# Altium PCB VT18-MODEL-B.PcbDoc (part 1 of 3)
Units mil, origin at the board's own origin, x right, y up, seen from the top; angles counter-clockwise.
Board outline 4724.41 x 4645.67 mil, 4 copper layers (Top Layer, Internal Plane 1, Internal Plane 2, Bottom Layer), stack 30.635 mil thick; 246 components, 149 nets, 926 pads, 600 vias.
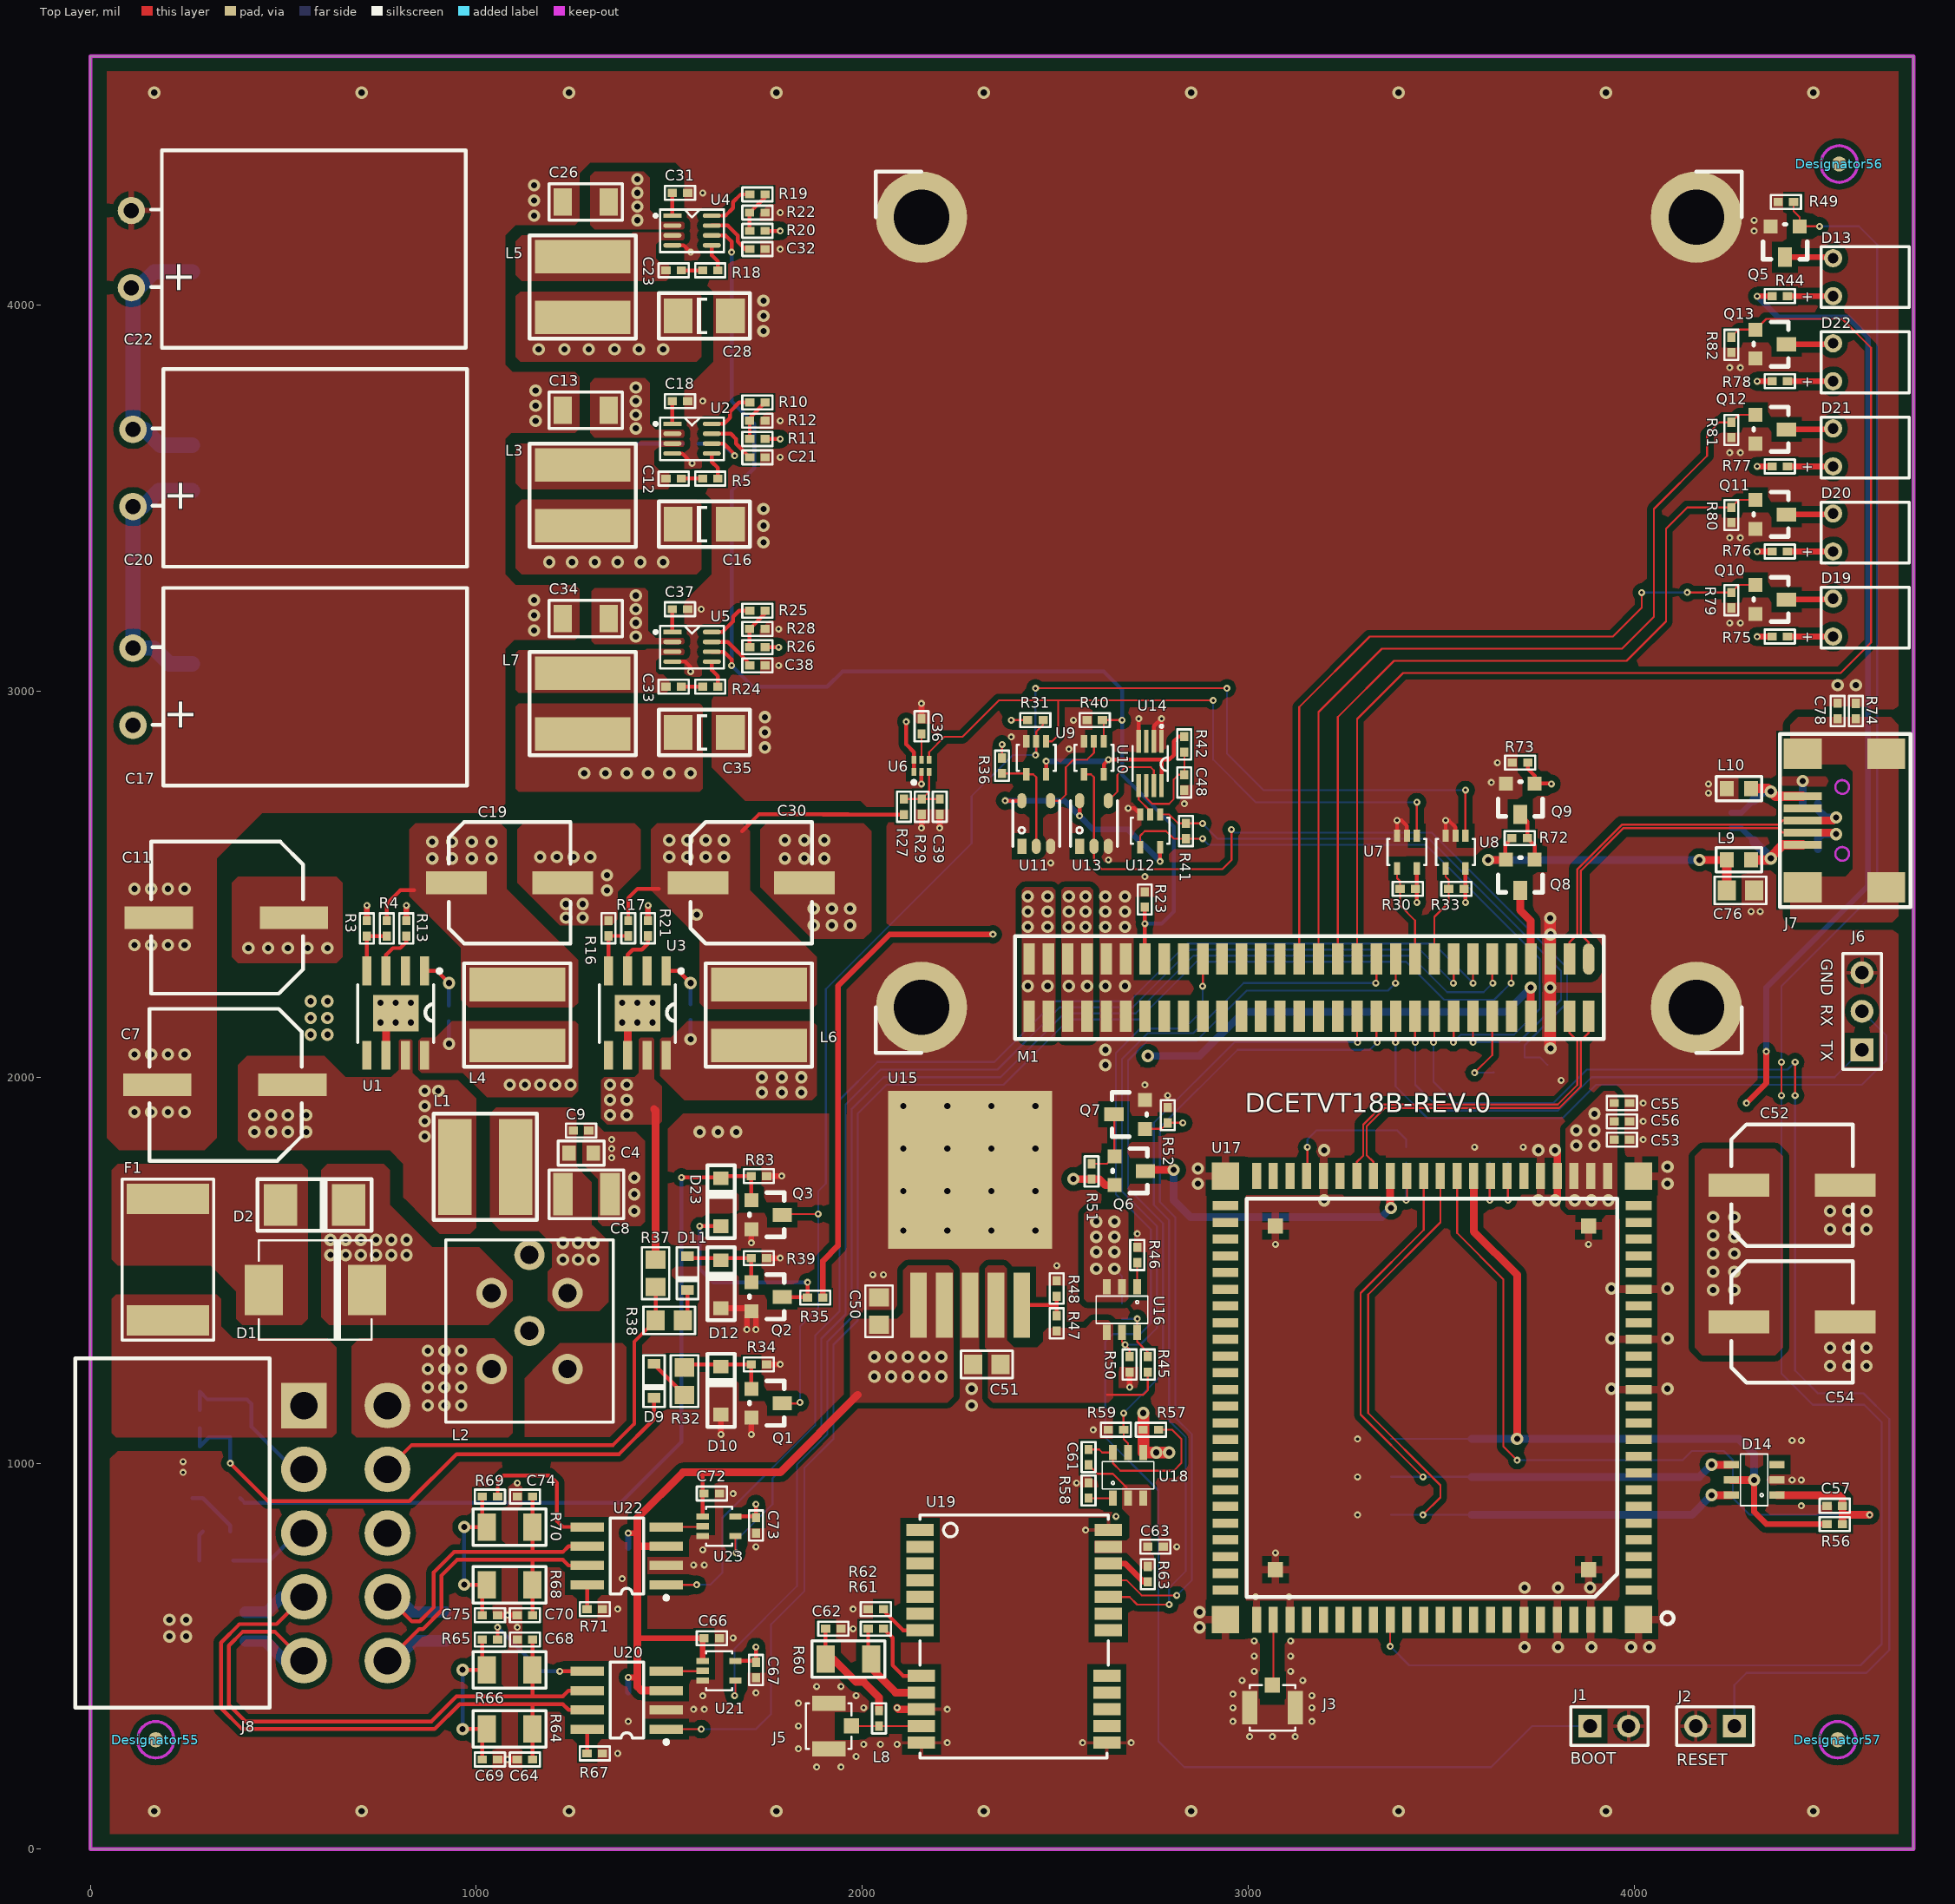
[diagram p0: Top Layer view]
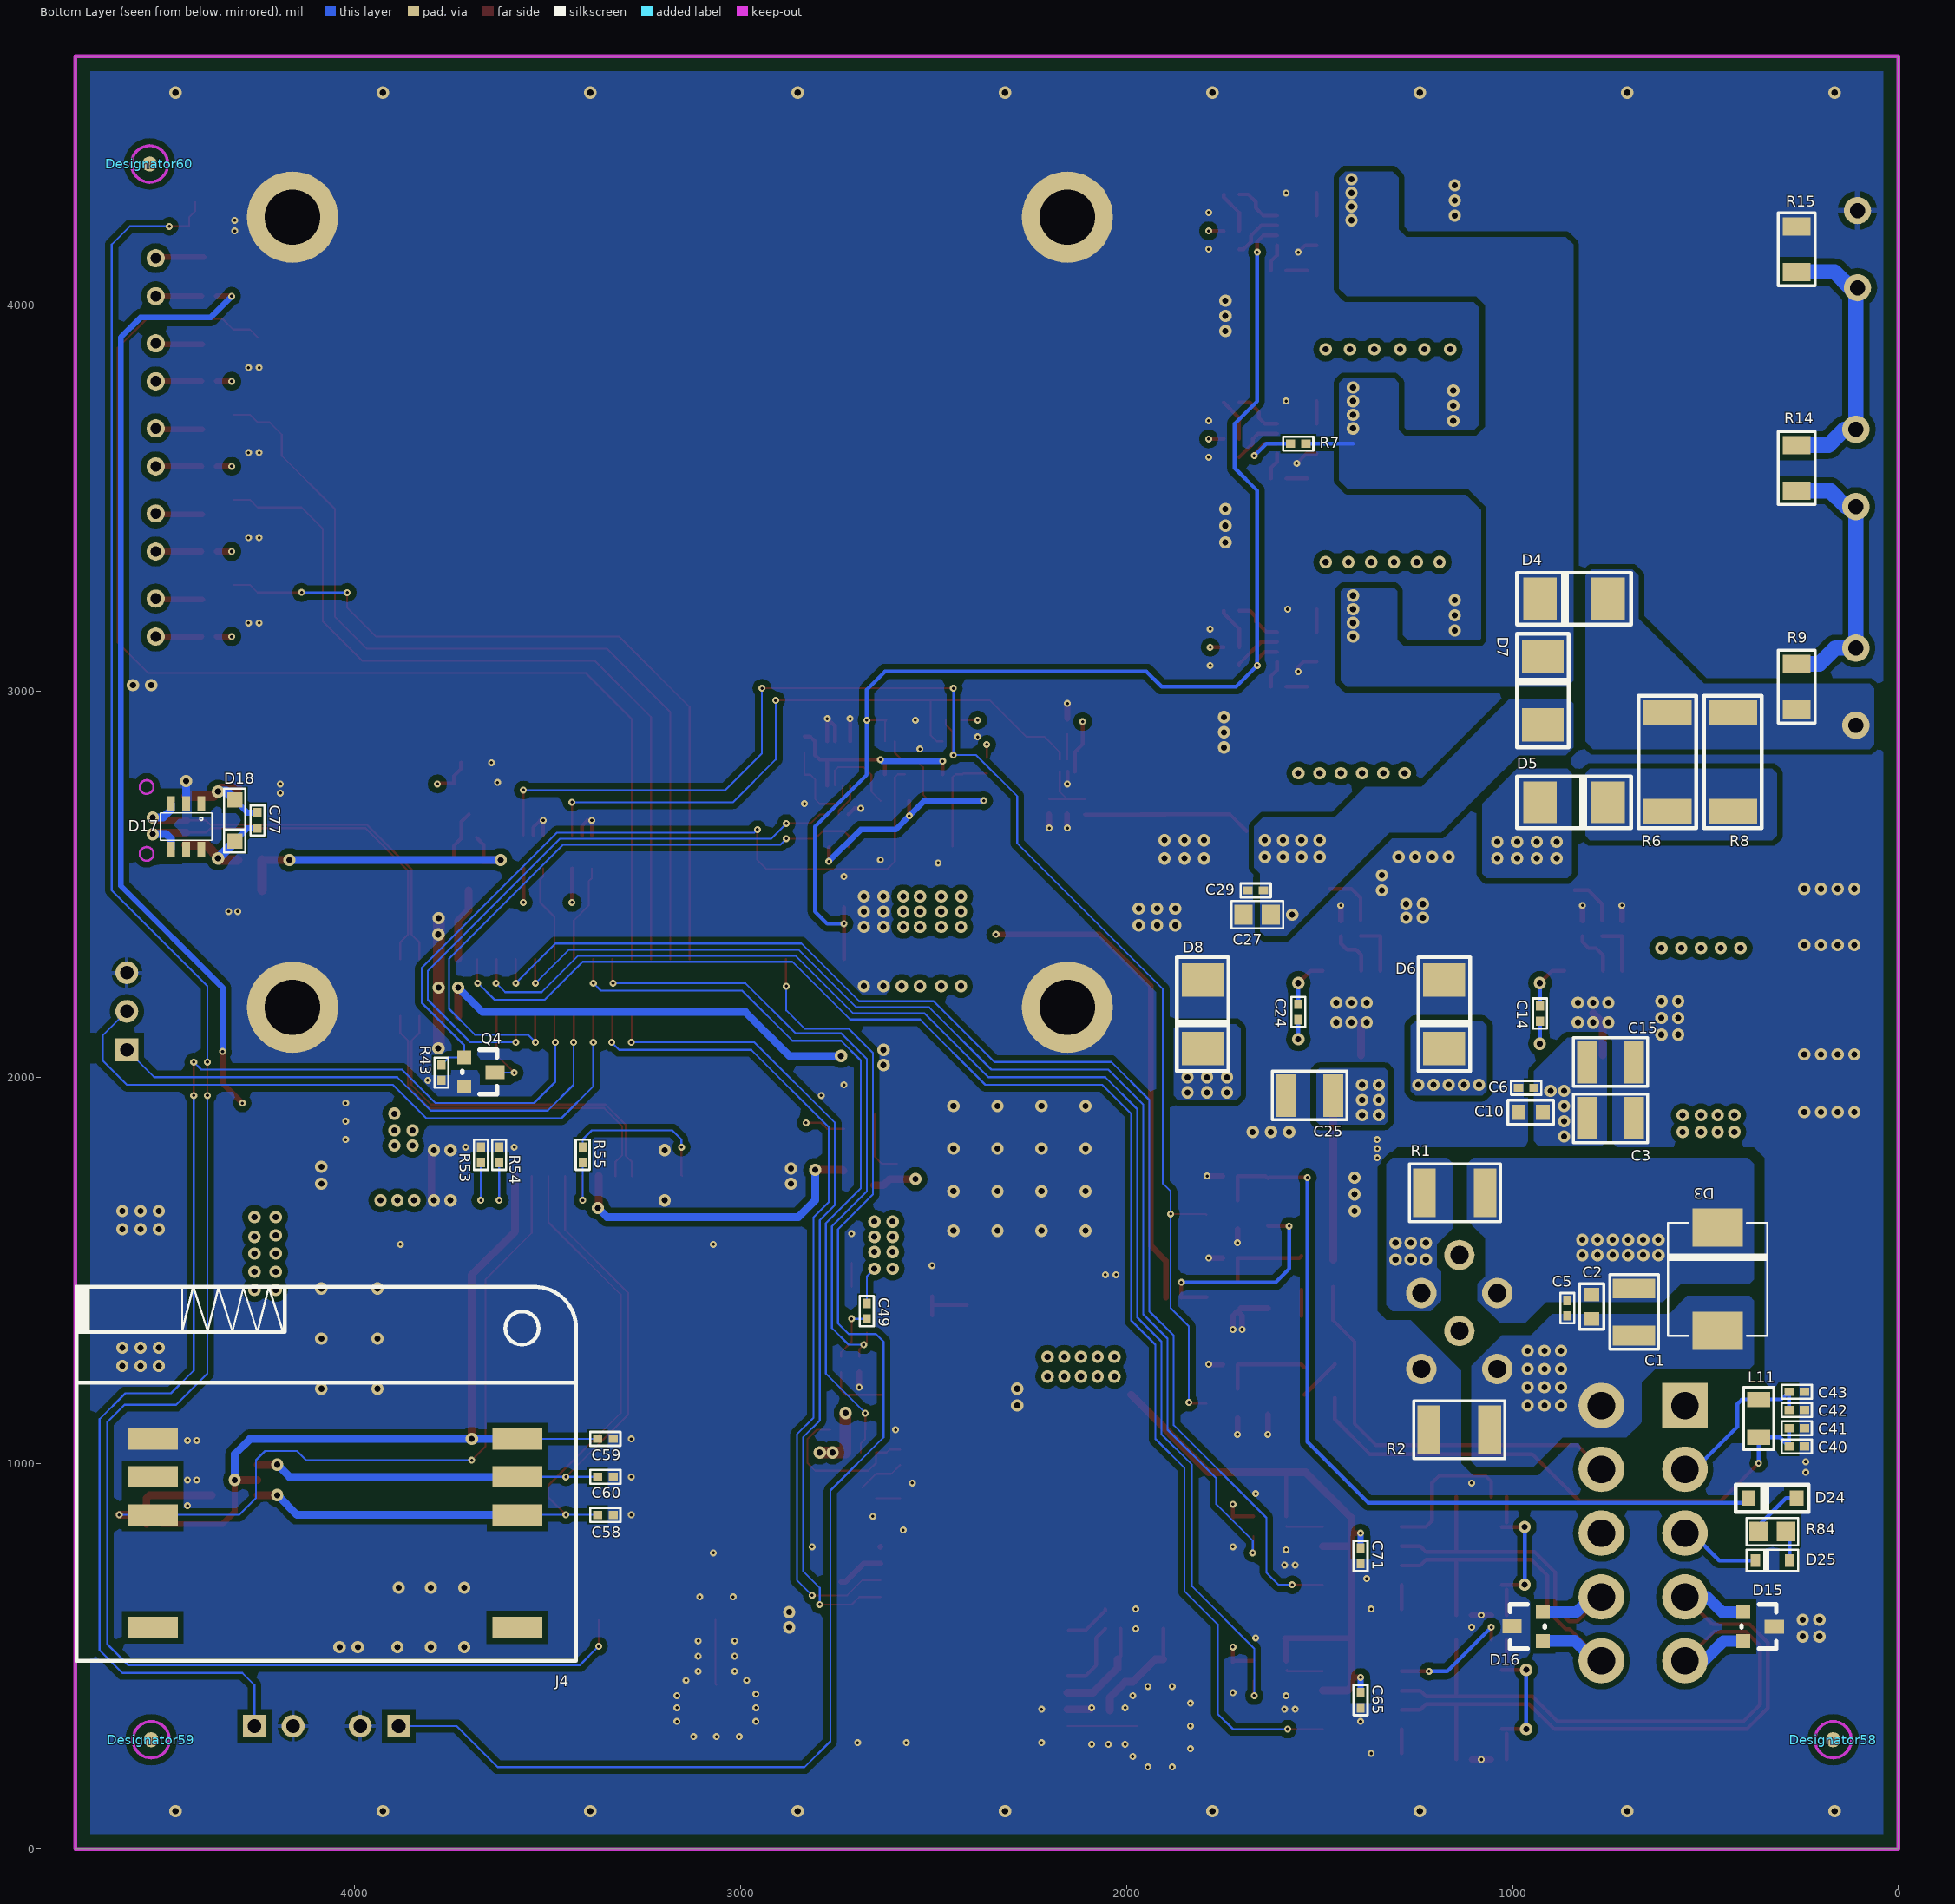
[diagram p1: Bottom Layer view, seen from below]
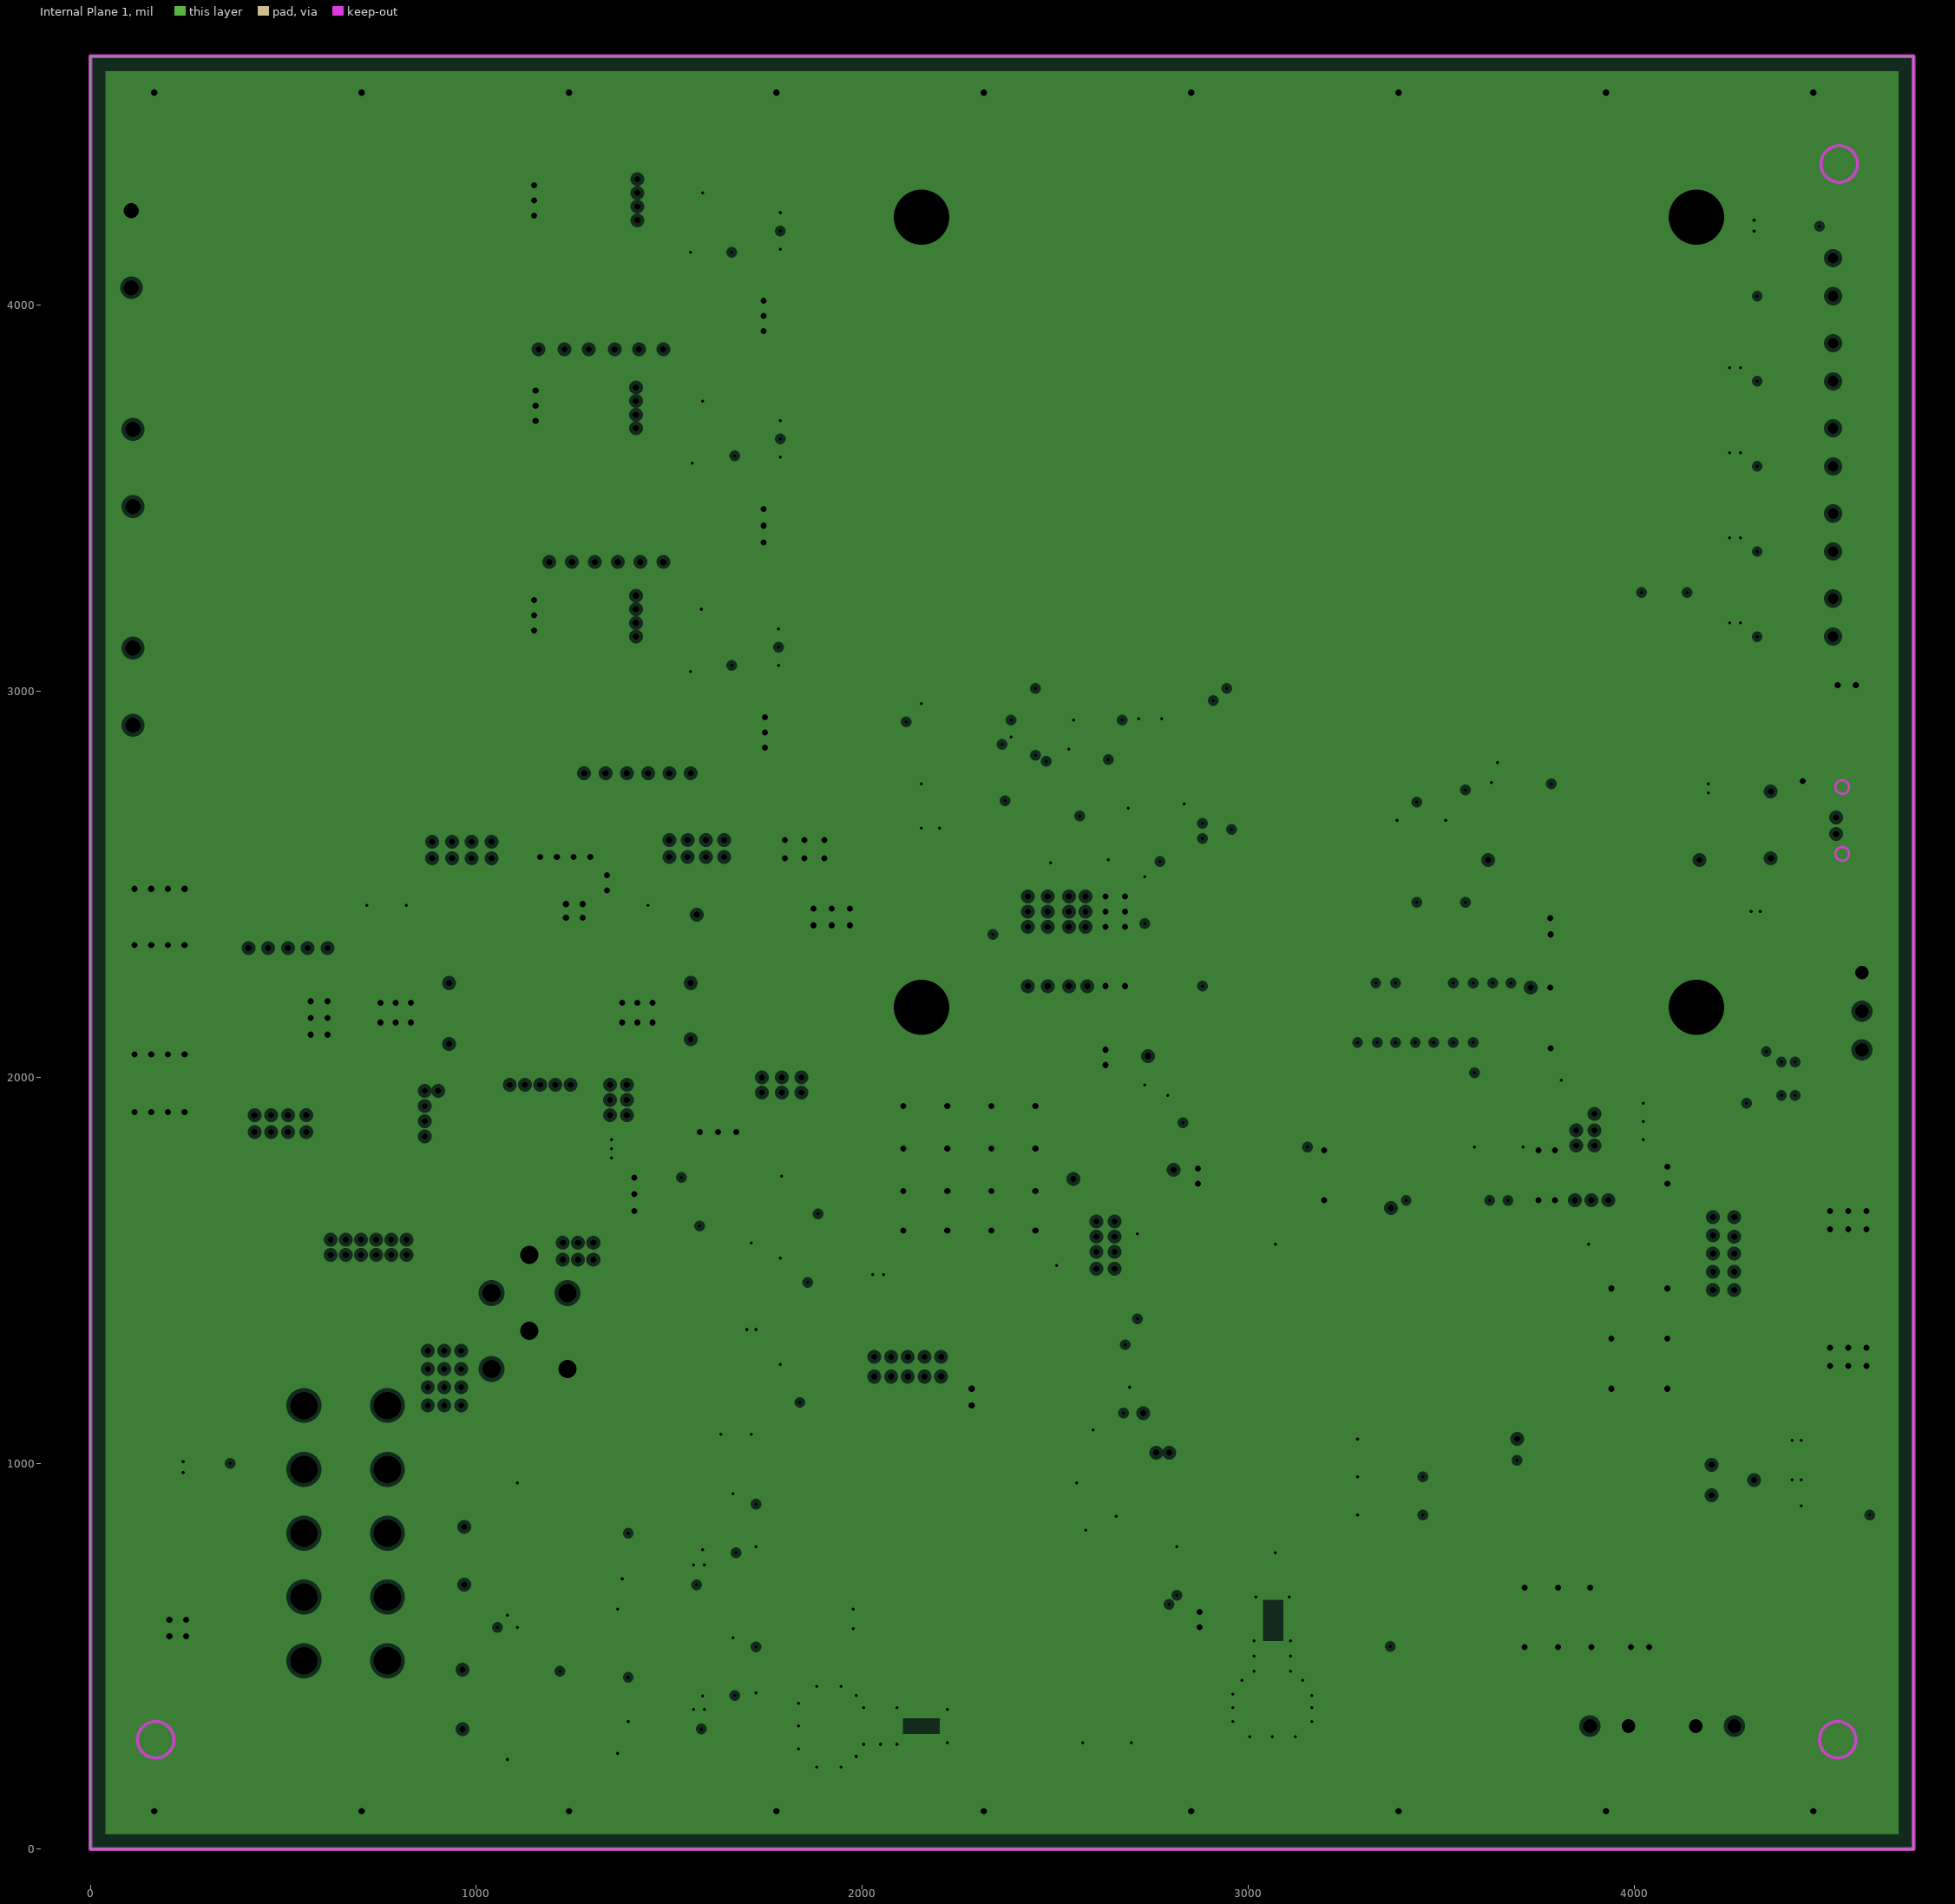
[diagram p2: Internal Plane 1, clearances drawn from the general rule]
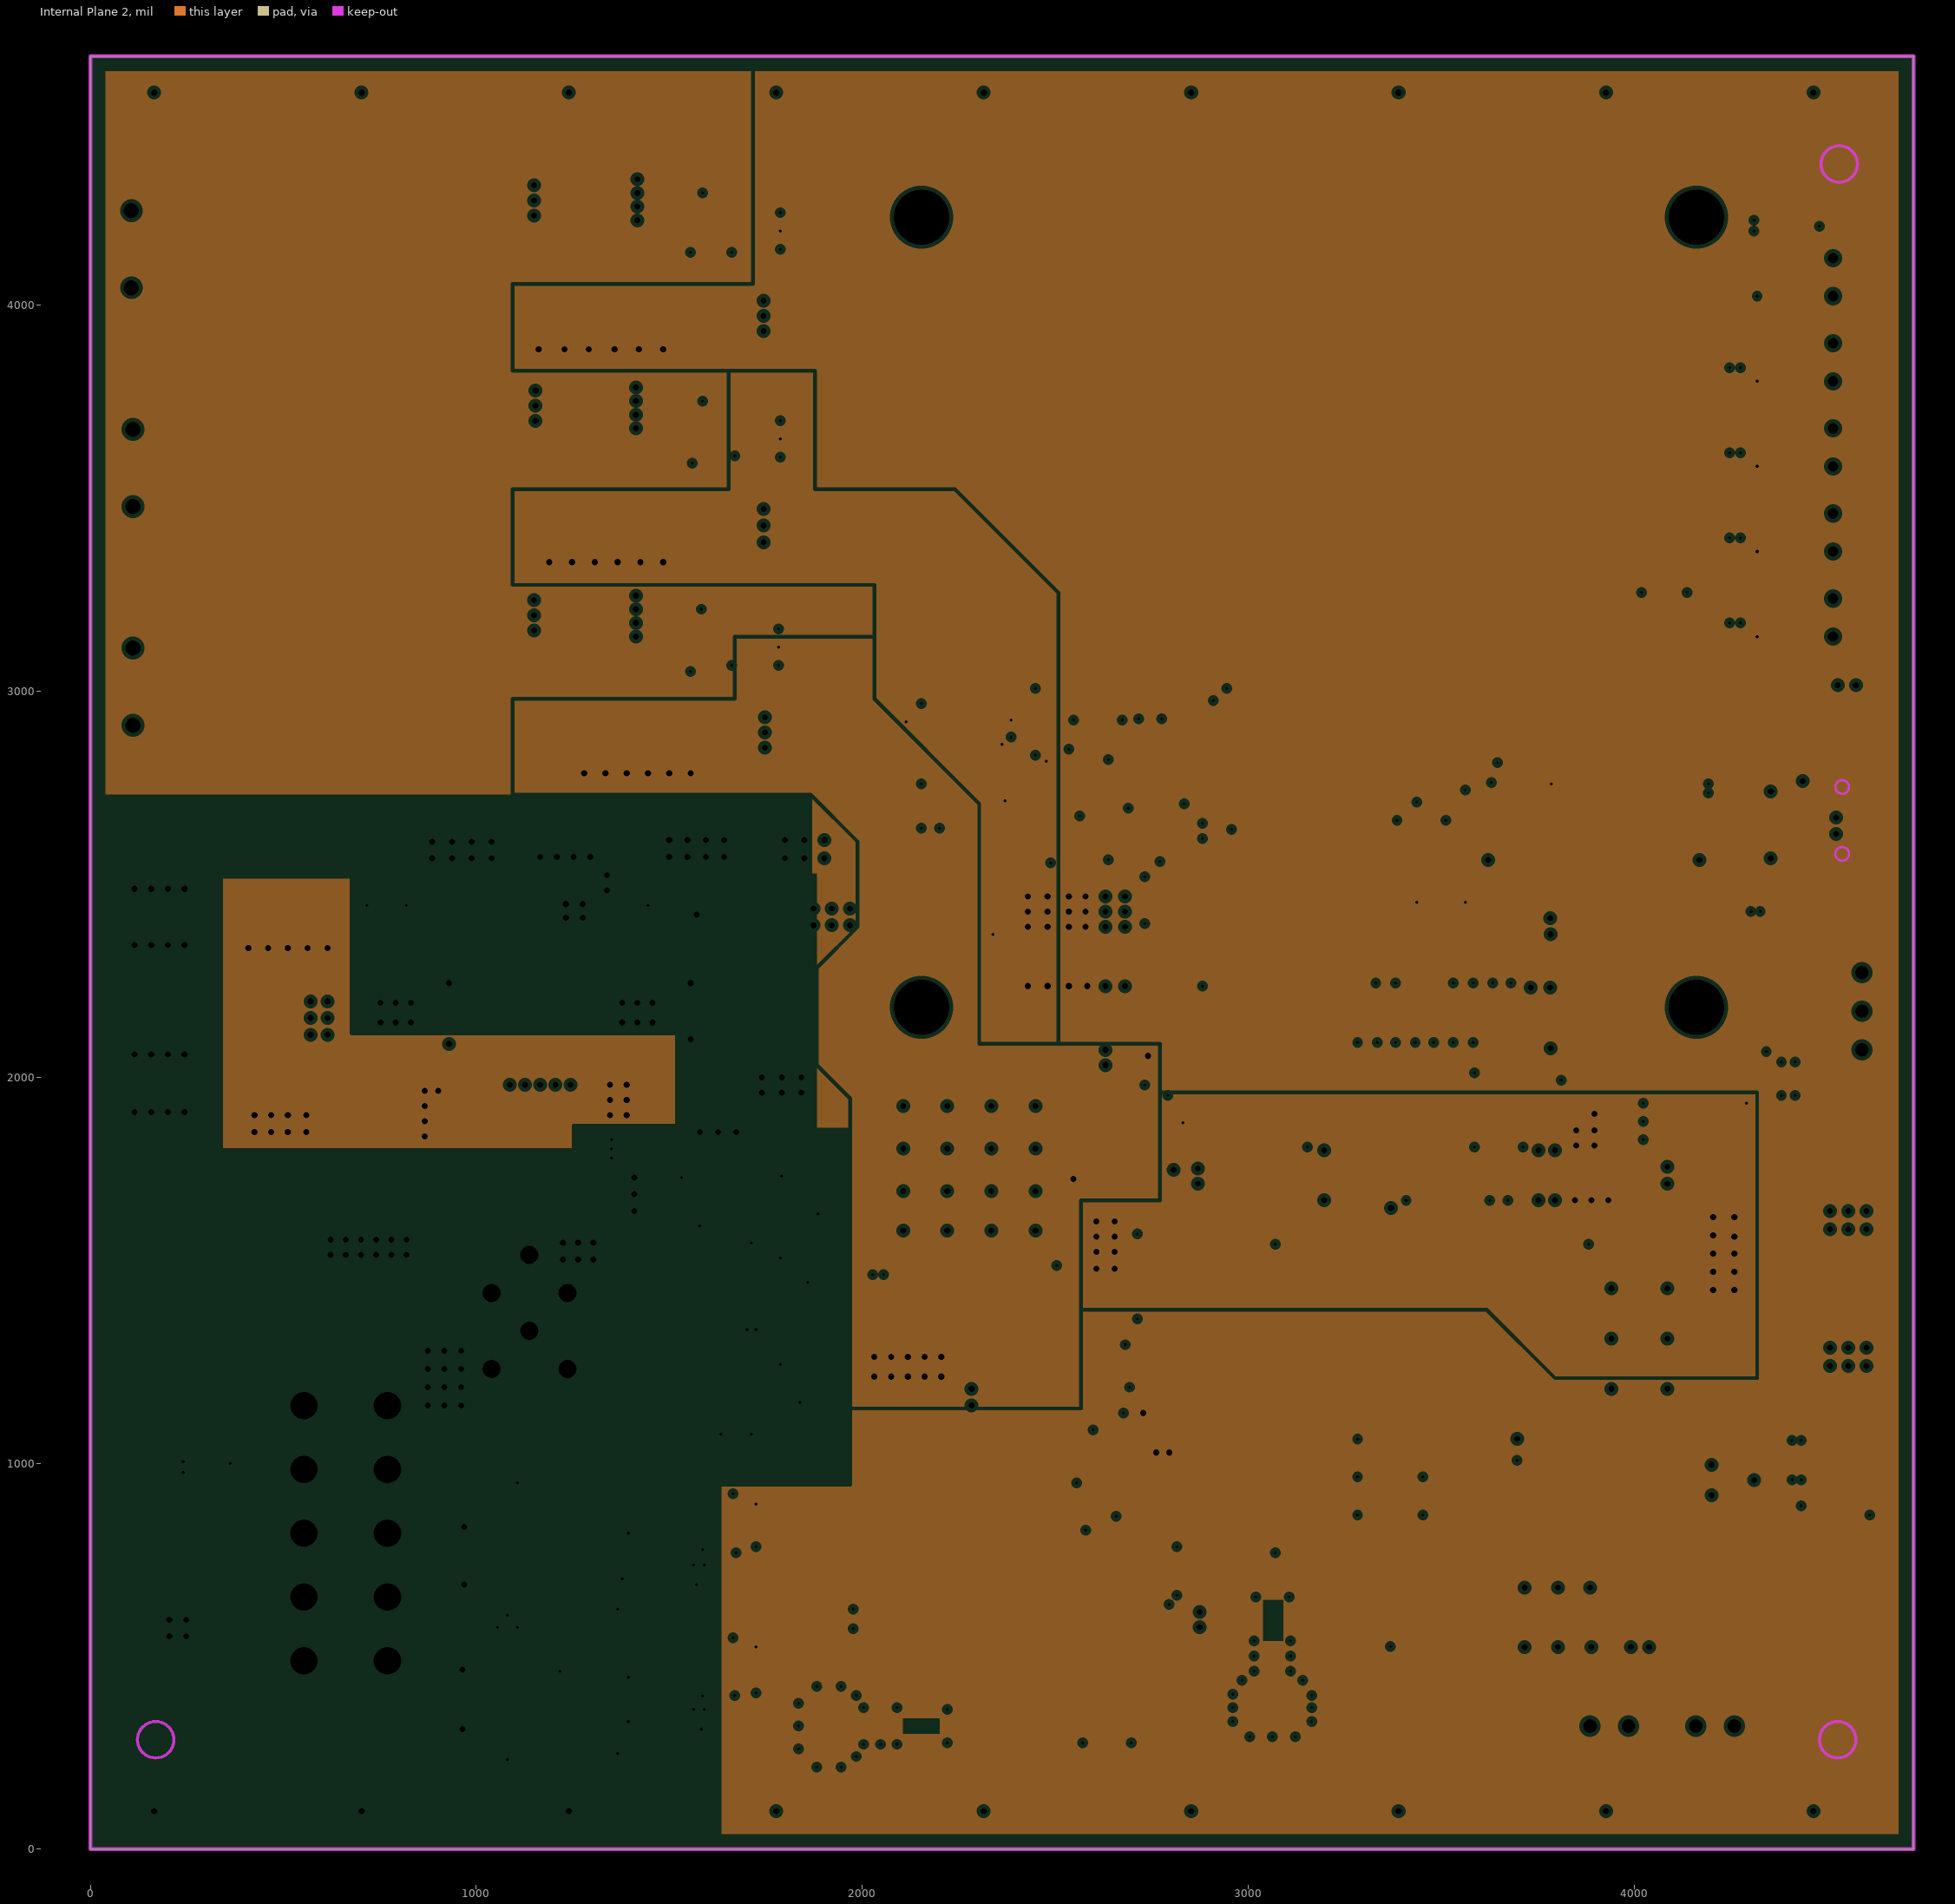
[diagram p3: Internal Plane 2, clearances drawn from the general rule]

## Layer stack, top to bottom
Top Solder: solder mask 0.4, Solder Resist, Dk 3.5
Top Layer: signal copper 1.4
Dielectric 1: core 10, FR-4, Dk 4.2
Internal Plane 1: plane copper 1.4173
Dielectric 3: prepreg 5, Dk 4.2
Internal Plane 2: plane copper 1.4173
Dielectric 2: core 10, Dk 4.2
Bottom Layer: signal copper 1.4
Bottom Solder: solder mask 0.4, Solder Resist, Dk 3.5

## Board outline
0,0 4724.41,0 4724.41,4645.67 0,4645.67

## Design rules (kind name [scope] priority, off if disabled: settings)
Clearance Clearance_5 [InDifferentialPairClass('USB') vs InPolygon AND InNet('GND')] p1: gap=20
Clearance Clearance_4 [InPolygon AND InNet('GND') vs InNet('OTG-SH-GND')] p2: gap=20
Clearance Clearance_3 [InPolygon AND InNet('GND')] p3: gap=15
Clearance Clearance_2 [InComponent('C17') OR InComponent('C20') OR InComponent('C22')] p4: gap=20
Clearance Clearance_1 [InDifferentialPairClass('USB')] p5: gap=3.7
Clearance [All] p6: gap=5
ComponentClearance [All] p1: gap=0 collisioncheckmode=3 verticalgap=0 showdistances=FALSE
DiffPairsRouting DiffPairsRouting_1 [InDifferentialPairClass('USB')] p1: maxlimit=10 minlimit=3.7 mostfreqgap=3.7 toplayer_minwidth=5.3 toplayer_maxwidth=20 toplayer_prefwidth=5.3 bottomlayer_minwidth=5.3 bottomlayer_maxwidth=20 bottomlayer_prefwidth=5.3 maxuncoupledlength=500
DiffPairsRouting [All] p2: maxlimit=10 minlimit=10 mostfreqgap=10 toplayer_minwidth=10 toplayer_maxwidth=40 toplayer_prefwidth=10 bottomlayer_minwidth=10 bottomlayer_maxwidth=40 bottomlayer_prefwidth=10 maxuncoupledlength=500
PlaneClearance PlaneClearance_2 [InComponent('L2') OR InComponent('J8')] p1: clearance=30
PlaneClearance PlaneClearance_1 [InPadClass('MT')] p2: clearance=40
PlaneClearance [All] p3: clearance=10
PlaneConnect PlaneConnect_3 [InComponent('C22')] p1: planeconnectstyle=Relief reliefexpansion=20 reliefentries=4 reliefconductorwidth=15 reliefairgap=10
PlaneConnect PlaneConnect_2 [IsVia] p2: planeconnectstyle=Direct reliefexpansion=20 reliefentries=4 reliefconductorwidth=10 reliefairgap=10
PlaneConnect PlaneConnect_1 [InComponent('L2')] p3: planeconnectstyle=Relief reliefexpansion=20 reliefentries=4 reliefconductorwidth=20 reliefairgap=15
PlaneConnect [All] p4: planeconnectstyle=Relief reliefexpansion=20 reliefentries=4 reliefconductorwidth=10 reliefairgap=10
PolygonConnect PolygonConnect_4 [InComponent('U19')] p1: connectstyle=Relief reliefconductorwidth=10 reliefentries=4 polygonreliefangle="90 Angle" airgapwidth=15
PolygonConnect PolygonConnect_3 [InComponent('U17')] p2: connectstyle=Relief reliefconductorwidth=20 reliefentries=4 polygonreliefangle="90 Angle" airgapwidth=15
PolygonConnect PolygonConnect_2 [InComponent('J1') OR InComponent('J2') OR InComponent('J6')] p3: connectstyle=Relief reliefconductorwidth=10 reliefentries=4 polygonreliefangle="90 Angle" airgapwidth=10
PolygonConnect PolygonConnect_1 [InComponent('C22')] p4: connectstyle=Relief reliefconductorwidth=15 reliefentries=4 polygonreliefangle="90 Angle" airgapwidth=15
PolygonConnect [All] p5: connectstyle=Direct reliefconductorwidth=10 reliefentries=4 polygonreliefangle="90 Angle" airgapwidth=10
RoutingVias [All] p1: holewidth=8 width=18 viastyle="Through Hole" minholewidth=8 minwidth=18 maxholewidth=28 maxwidth=50
SolderMaskExpansion [All] p1: expansion=4
Width [All] p1: maxlimit=40 minlimit=3.5 preferedwidth=5 minimp=50.000000 maximp=50.000000 favimp=50.000000
26 further rules are at their usual default settings.

## Classes and differential pairs
component class 10-CONNECTOR: J8
component class 09-LED: D19 D20 D21 D22 Q10 Q11 Q12 Q13 R75 R76 R77 R78 R79 R80 R81 R82
component class 08-USB: C76 C77 C78 D17 D18 J7 L9 L10 Q8 Q9 R72 R73 R74
component class 07-CAN&UART: C64 C65 C66 C67 C68 C69 C70 C71 C72 C73 C74 C75 D15 D16 J6 R64 R65 R66 R67 R68 R69 R70 R71 U20 U21 U22 U23
component class 06-GPS: C61 C62 C63 J5 L8 R57 R58 R59 R60 R61 R62 R63 U18 U19
component class 05-MODEM: C49 C50 C51 C52 C53 C54 C55 C56 C57 C58 C59 C60 D13 D14 J3 J4 Q5 Q6 Q7 R44 R45 R46 R47 R48 R49 R50 R51 R52 R53 R54 R55 R56 U15 U16 U17
component class 04-CPU_BOARD: J1 J2 M1
component class 03-POWER_CTRL: C40 C41 C42 C43 C48 D9 D10 D11 D12 D23 D24 D25 L11 Q1 Q2 Q3 Q4 R31 R32 R33 R34 R35 R36 R37 R38 R39 R40 R41 R42 R43 R83 R84 U8 U9 U10 U11 U12 U13 U14
component class 02-POWER: C12 C13 C14 C15 C16 C17 C18 C19 C20 C21 C22 C23 C24 C25 C26 C27 C28 C29 C30 C31 C32 C33 C34 C35 C36 C37 C38 C39 D4 D5 D6 D7 D8 L3 L4 L5 L6 L7 R3 R4 R5 R6 R7 R8 R9 R10 R11 R12 R13 R14 R15 R16 R17 R18 R19 R20 R21 R22 R23 R24 R25 R26 R27 R28 R29 R30 U1 U2 U3 U4 U5 U6 U7
component class 01-POWER-FILTER: C1 C2 C3 C4 C5 C6 C7 C8 C9 C10 C11 D1 D2 D3 F1 L1 L2 R1 R2
pad class MT: M1-MT1 M1-MT2 M1-MT3 M1-MT4
differential pair class USB: OTG USB-HOST
differential pair USB-HOST: +USB-HOST_P -USB-HOST_N
differential pair OTG: +OTG_P -OTG_N
differential pair CAN2: +CAN2_P -CAN2_N
differential pair CAN1: +CAN1_P -CAN1_N

## Components (designator, comment, footprint, x,y, rotation, side; value= is the part's Value field where it differs from the comment)
C1 "10uF/50V" 1210 685.04,1452.76 r270 bottom
C2 "0.22uF/50V" 0603 795.28,1405.51 r180 bottom
C3 "10uF/50V" 1210 807.09,1893.7 r180 bottom
C4 "0.22uF/50V(DNP)" 0603 1271.65,1803.15 r90 top
C5 "1000pF/50V" 0402 858.27,1401.57 r90 bottom
C6 "1000pF/50V" 0402 964.57,1972.44 r180 bottom
C7 "220uF/50V" DL-10*10.5 350.39,1980.31 r270 top
C8 "10uF/50V(DNP)" 1210 1224.41,1696.85 r0 top
C9 "1000pF/50V(DNP)" 0402 1271.65,1862.2 r180 top
C10 "0.22uF/50V" 0603 952.76,1909.45 r270 bottom
C11 "220uF/50V" DL-10*10.5 354.33,2413.39 r270 top
C12 "0.1uF/50V" 0402 1511.62,3551.18 r180 top
C13 "10uF/16V" 1206 1224.41,3728.35 r0 top
C14 "0.01uF/50V" 0402 929.13,2165.35 r270 bottom
C15 "10uF/50V" 1210 807.09,2039.37 r180 bottom
C16 "47uF/10V(tan)" 3528 1590.55,3433.07 r180 top
C17 "10F/2.7V" SUPERCAP 110.24,3011.81 r90 top
C18 "0.022uF/50V" 0402 1527.56,3751.97 r0 top
C19 "220uF/25V" DL-8*10.5 1086.61,2503.94 r90 top
C20 "10F/2.7V" SUPERCAP 110.24,3578.74 r90 top
C21 "0.1uF/50V" 0402 1728.35,3606.3 r0 top
C22 "10F/2.7V" SUPERCAP 106.3,4145.67 r90 top
C23 "0.1uF/50V" 0402 1511.62,4090.55 r180 top (schematic designator C12)
C24 "0.01uF/50V" 0402 1555.12,2169.29 r270 bottom
C25 "10uF/50V" 1210 1464.57,1952.76 r0 bottom
C26 "10uF/16V" 1206 1224.41,4267.72 r0 top (schematic designator C13)
C27 "4.7uF/25V" 0805 1696.85,2421.26 r180 bottom
C28 "47uF/10V(tan)" 3528 1590.55,3972.44 r180 top (schematic designator C16)
C29 "0.22uF/16V" 0402 1665.35,2484.25 r0 bottom
C30 "220uF/25V" DL-8*10.5 1712.6,2503.94 r90 top
C31 "0.022uF/50V" 0402 1527.56,4291.34 r0 top (schematic designator C18)
C32 "0.1uF/50V" 0402 1728.35,4145.67 r0 top (schematic designator C21)
C33 "0.1uF/50V" 0402 1511.62,3011.81 r180 top (schematic designator C12)
C34 "10uF/16V" 1206 1224.41,3188.98 r0 top (schematic designator C13)
C35 "47uF/10V(tan)" 3528 1590.55,2893.7 r180 top (schematic designator C16)
C36 "0.1uF/50V" 0402 2153.54,2909.45 r270 top
C37 "0.022uF/50V" 0402 1527.56,3212.6 r0 top (schematic designator C18)
C38 "0.1uF/50V" 0402 1728.35,3066.93 r0 top (schematic designator C21)
C39 "0.01uF/50V" 0402 2200.79,2700.79 r90 top
C40 "0.1uF/50V" 0402 263.34,1043.31 r0 bottom
C41 "100pF/50V" 0402 263.34,1090.55 r0 bottom
C42 "0.1uF/50V" 0402 263.34,1137.8 r0 bottom
C43 "100pF/50V" 0402 263.34,1185.04 r0 bottom
C48 "0.22uF/16V" 0402 2834.65,2763.78 r90 top
C49 "1uF/6.3V" 0402 2673.23,1393.7 r90 bottom
C50 "10uF/10V" 0805 2043.31,1429.13 r270 top
C51 "10uF/10V" 0805 2287.4,1255.91 r0 top
C52 "470uF/6.3V" DL-8*10.5 4409.45,1720.47 r90 top
C53 "0.1uF/50V" 0402 3968.5,1838.58 r180 top
C54 "470uF/6.3V" DL-8*10.5 4409.45,1366.14 r90 top
C55 "33pF/50V" 0402 3968.5,1933.07 r180 top
C56 "100pF/50V" 0402 3968.5,1885.83 r180 top
C57 "33pF/50V" 0402 4519.68,889.76 r0 top
C58 "33pF/50V" 0402 3350.39,866.14 r0 bottom
C59 "0.1uF/50V" 0402 3350.39,1062.99 r0 bottom
C60 "33pF/50V" 0402 3350.39,964.57 r0 bottom
C61 "0.47uF/6.3V" 0402 2586.61,1015.75 r270 top
C62 "0.01uF/50V" 0402 1925.2,570.87 r180 top
C63 "0.1uF/50V" 0402 2759.84,783.46 r180 top
C64 "56pF/50V" 0402 1125.98,232.28 r180 top
C65 "0.1uF/50V" 0402 1393.7,385.83 r90 bottom
C66 "0.1uF/50V" 0402 1610.24,546.8 r180 top
C67 "0.1uF/50V" 0402 1724.41,464.13 r90 top
C68 "56pF/50V" 0402 1125.98,543.31 r0 top
C69 "1000pF(DNP)" 0402 1035.43,232.28 r180 top
C70 "56pF/50V" 0402 1125.98,606.3 r180 top
C71 "0.1uF/50V" 0402 1393.7,759.84 r90 bottom
C72 "0.1uF/50V" 0402 1610.24,921.26 r180 top
C73 "0.1uF/50V" 0402 1724.41,838.58 r90 top
C74 "56pF/50V" 0402 1125.98,913.39 r0 top
C75 "1000pF(DNP)" 0402 1035.43,606.3 r180 top
C76 "10uF/10V" 0805 4311.02,2484.25 r180 top
C77 "0.1uF/50V" 0402 4251.97,2665.35 r90 bottom
C78 "0.1uF/50V" 0402 4527.55,2948.8 r90 top
D1 "SMDJ33CA" SMC 448.82,1448.82 r180 top
D2 "MBRS260T3G" SMB 492.13,1669.29 r0 top
D3 "5.0SMDJ36A" SMC 468.5,1342.52 r270 bottom
D4 "MBRS260T3G" SMB 751.97,3240.16 r0 bottom
D5 "MBRS260T3G" SMB 929.13,2712.6 r180 bottom
D6 "MBRS260T3G" SMB 1177.17,2251.97 r270 bottom
D7 "MBRS260T3G" SMB 921.26,2913.39 r90 bottom
D8 "MBRS260T3G" SMB 1803.15,2251.97 r270 bottom
D9 "MM3Z6V2ST1G" SOD323#1 1460.63,1169.29 r270 top
D10 "1N4148W" SOD123 1633.86,1125.98 r90 top
D11 "MM3Z6V2ST1G" SOD323#1 1547.24,1448.82 r270 top
D12 "1N4148W" SOD123 1633.86,1401.57 r90 top
D13 "LED GREEN" LED-3MM 4515.75,4122.05 r270 top locked
D14 "SRV05-4" SOT23-6 4370.08,917.32 r90 top
D15 "PESD1CAN" PESD2CAN 401.57,614.17 r270 bottom
D16 "PESD1CAN" PESD2CAN 921.26,539.37 r90 bottom
D17 "SRV05-4" SOT23-6 4397.64,2708.66 r0 bottom
D18 "PESD5V0L1BA" SOD323#2 4311.02,2665.35 r270 bottom
D19 "LED GREEN" LED-3MM 4515.75,3240.16 r270 top locked
D20 "LED GREEN" LED-3MM 4515.75,3460.63 r270 top locked
D21 "LED GREEN" LED-3MM 4515.75,3681.1 r270 top locked
D22 "LED GREEN" LED-3MM 4515.75,3901.57 r270 top locked
D23 "1N4148W" SOD123 1633.86,1614.17 r90 top
D24 "1N4148W" SOD123 263.78,909.45 r0 bottom
D25 "MM3Z6V2ST1G" SOD323#1 370.08,748.03 r0 bottom
Designator55 "Comment" MARK 169.29,283.46 r0 top locked
Designator56 "Comment" MARK 4531.5,4366.14 r0 top locked
Designator57 "Comment" MARK 4527.56,283.46 r0 top locked
Designator58 "Comment" MARK 169.29,283.46 r180 bottom locked
Designator59 "Comment" MARK 4527.56,283.46 r180 bottom locked
Designator60 "Comment" MARK 4531.5,4366.14 r180 bottom locked
F1 "1.85A/33V" 2920 200.79,1685.04 r270 top
J1 "BOOT MODE" HDR1X2 3885.83,318.9 r0 top
J2 "CPU RESET" HDR1X2 4259.84,318.9 r180 top
J3 "MODEM ANT" ANT 3062.99,366.14 r180 top
J4 "SIMCARD" SIM_CARD1 3578.74,1062.99 r180 bottom locked
J5 "GPS ANT" ANT 1913.39,318.9 r90 top
J6 "DEBUG UART" HDR1X3 4590.55,2070.87 r90 top
J7 "USB OTG" MINIUSB-TYPEAB 4437.01,2665.35 r270 top locked
J8 "DEVICE CONNECTOR" 5557-10P 661.42,818.9 r0 top locked
L1 "8.2uH/1.6A" IND-SMD-5.8*5.8 1023.62,1767.72 r270 top
L2 "BNX003-01(DNP)" BNX002-001 1137.8,1342.52 r90 top
L3 "4.7uH/2A" IND-SMD-5.8*5.8 1275.59,3507.87 r0 top
L4 "8.2uH/1.6A" IND-SMD-5.8*5.8 1106.3,2161.42 r180 top
L5 "4.7uH/2A" IND-SMD-5.8*5.8 1275.59,4047.24 r0 top (schematic designator L3)
L6 "8.2uH/1.6A" IND-SMD-5.8*5.8 1732.28,2161.42 r180 top
L7 "4.7uH/2A" IND-SMD-5.8*5.8 1275.59,2968.5 r0 top (schematic designator L3)
L8 "27nH/350mA" 0402 2043.31,338.58 r90 top
L9 "120ohm/100MHz 1A" 0603 4271.65,2562.99 r90 top
L10 "120ohm/100MHz 1A" 0603 4271.65,2748.03 r90 top
L11 "10uH/150mA" NLFV25 362.2,1066.93 r90 bottom
M1 "VT18-CPU-BOARD" VT18-CPU-BOARD 2035.43,4346.46 r270 top locked
Q1 "S9014" NPN 1712.6,1192.91 r270 top
Q2 "S9014" NPN 1712.6,1468.5 r270 top
Q3 "S9014" NPN 1712.6,1681.1 r270 top
Q4 "BSS138P" NPN 3716.54,2051.18 r270 bottom
Q5 "BSS138P" NPN 4429.13,4204.72 r180 top
Q6 "IRLML6402" MOSFET 2653.54,1795.28 r270 top
Q7 "BSS138P" NPN 2732.28,1866.14 r90 top
Q8 "IRLML6402" MOSFET 3742.72,2564.25 r180 top
Q9 "BSS138P" NPN 3742.72,2761.1 r180 top
Q10 "BSS138P" NPN 4314.96,3275.59 r270 top
Q11 "BSS138P" NPN 4314.96,3496.06 r270 top
Q12 "BSS138P" NPN 4314.96,3716.54 r270 top
Q13 "BSS138P" NPN 4314.96,3937.01 r270 top
R1 "0" 1812 1228.35,1700.79 r180 bottom
R2 "0" 1812 1216.54,1086.61 r180 bottom
R3 "1K/1%" 0402 716.54,2385.83 r270 top
R4 "5.23K/1%" 0402 767.72,2385.83 r270 top
R5 "10" 0402 1606.3,3551.18 r180 top
R6 "20/1W" 2512 598.43,2688.98 r90 bottom
R7 "100K" 0402 1555.12,3641.73 r0 bottom
R8 "20/1W" 2512 429.13,2688.98 r90 bottom
R9 "560/0.25W" 1206 263.78,2952.76 r90 bottom
R10 "33K/1%" 0402 1728.35,3748.03 r0 top
R11 "40.2K/1%" 0402 1728.35,3653.54 r0 top
R12 "13K/1%" 0402 1728.35,3700.79 r180 top
R13 "DNP" 0402 818.9,2385.83 r270 top
R14 "560/0.25W" 1206 263.78,3519.69 r90 bottom
R15 "560/0.25W" 1206 263.78,4086.61 r90 bottom
R16 "1K/1%" 0402 1342.52,2386.27 r270 top
R17 "5.62K/1%" 0402 1393.7,2386.27 r270 top
R18 "10" 0402 1606.3,4090.55 r180 top (schematic designator R5)
R19 "33K/1%" 0402 1728.35,4287.4 r0 top (schematic designator R10)
R20 "40.2K/1%" 0402 1728.35,4192.91 r0 top (schematic designator R11)
R21 "DNP" 0402 1444.88,2386.27 r270 top
R22 "13K/1%" 0402 1728.35,4240.16 r180 top (schematic designator R12)
R23 "10K" 0402 2732.28,2460.63 r270 top
R24 "10" 0402 1606.3,3011.81 r180 top (schematic designator R5)
R25 "33K/1%" 0402 1728.35,3208.66 r0 top (schematic designator R10)
R26 "40.2K/1%" 0402 1728.35,3114.17 r0 top (schematic designator R11)
R27 "9.09K/1%" 0402 2107.98,2700.79 r270 top
R28 "7.68K/1%" 0402 1728.35,3161.42 r180 top (schematic designator R12)
R29 "1K/1%" 0402 2154.39,2700.79 r90 top
R30 "10K" 0402 3413.39,2488.19 r0 top
R31 "47K" 0402 2448.82,2925.2 r180 top
R32 "15K" 0805 1539.37,1248.03 r270 top
R33 "10K" 0402 3539.37,2488.19 r0 top
R34 "47K" 0402 1732.28,1255.91 r180 top
R35 "10K" 0402 1877.95,1429.13 r0 top
R36 "10K" 0402 2362.2,2807.09 r90 top
R37 "10K" 0805 1464.57,1527.56 r270 top
R38 "10K" 0805 1464.57,1370.08 r0 top
R39 "47K" 0402 1732.28,1531.5 r180 top
R40 "10K" 0402 2602.36,2925.2 r0 top
R41 "0(DNP)" 0402 2838.58,2637.8 r90 top
R42 "10K" 0402 2834.65,2862.2 r90 top
R43 "4.7K" 0402 3775.59,2011.81 r90 bottom
R44 "220" 0402 4377.95,4023.62 r180 top
R45 "47K" 0402 2740.16,1255.91 r270 top
R46 "3.3K" 0402 2712.6,1539.37 r90 top
R47 "226/1%" 0402 2503.94,1362.2 r90 top
R48 "107/1%" 0402 2503.94,1452.76 r270 top
R49 "10K" 0402 4393.7,4267.72 r180 top
R50 "2.2K" 0402 2692.91,1255.91 r270 top
R51 "47K" 0402 2594.49,1755.91 r90 top
R52 "47K" 0402 2791.34,1901.57 r90 top
R53 "0" 0402 3673.23,1799.21 r270 bottom
R54 "0" 0402 3625.98,1799.21 r270 bottom
R55 "10K" 0402 3409.45,1799.21 r270 bottom
R56 "10K" 0402 4519.68,842.52 r0 top
R57 "20K" 0402 2748.03,1086.61 r180 top
R58 "1K" 0402 2586.61,929.13 r90 top
R59 "2.2K" 0402 2657.48,1086.61 r180 top
R60 "10/0.25W" 1206 1905.51,492.13 r0 top
R61 "0(DNP)" 0402 2035.43,570.87 r180 top
R62 "0" 0402 2035.43,622.05 r180 top
R63 "0" 0402 2740.16,712.6 r270 top
R64 "62/(1/4W)(DNP)" 1206 1145.67,311.02 r180 top
R65 "0(DNP)" 0402 1035.43,543.31 r180 top
R66 "62(1/4W)(DNP)" 1206 1027.56,464.57 r0 top
R67 "0" 0402 1307.09,248.03 r180 top
R68 "62/(1/4W)(DNP)" 1206 1145.67,685.04 r180 top
R69 "0(DNP)" 0402 1035.43,913.39 r180 top
R70 "62(1/4W)(DNP)" 1206 1027.56,834.65 r0 top
R71 "0" 0402 1307.09,622.05 r180 top
R72 "47K" 0402 3703.35,2619.37 r0 top
R73 "47K" 0402 3704.72,2814.96 r180 top
R74 "100" 0402 4574.8,2948.82 r270 top
R75 "200" 0402 4377.95,3141.73 r180 top
R76 "200" 0402 4377.95,3362.2 r180 top
R77 "200" 0402 4377.95,3582.68 r180 top
R78 "200" 0402 4377.95,3803.15 r180 top
R79 "4.7K" 0402 4251.97,3236.22 r270 top
R80 "4.7K" 0402 4251.97,3456.69 r270 top
R81 "4.7K" 0402 4251.97,3677.17 r270 top
R82 "4.7K" 0402 4251.97,3897.64 r270 top
R83 "47K" 0402 1732.28,1744.09 r180 top
R84 "15K" 0805 362.2,822.83 r180 bottom
U1 "LM22676MR-ADJ" PSO8 866.14,2275.59 r180 top
U2 "MP1497DJ" TSOT23-8 1507.87,3692.91 r0 top
U3 "LM22676MR-ADJ" PSO8 1492.13,2275.59 r180 top
U4 "MP1497DJ" TSOT23-8 1507.87,4232.28 r0 top (schematic designator U2)
U5 "MP1497DJ" TSOT23-8 1507.87,3153.54 r0 top (schematic designator U2)
U6 "TPS3895P" SON 2133.86,2791.34 r0 top
U7 "NC7SP125P5X" SC70 3437.01,2625.98 r180 top
U8 "NC7SP126P5X" SC70 3562.99,2625.98 r180 top
U9 "NC7SP126P5X" SC70 2476.38,2870.08 r180 top
U10 "NC7SP125P5X" SC70 2625.98,2870.08 r180 top
U11 "74HC1G04" SOT753 2413.39,2598.43 r90 top
U12 "NC7SP08P5X" SC70 2771.65,2681.1 r180 top
U13 "74HC1G04" SOT753 2562.99,2598.43 r90 top
U14 "NC7SZ74K8X" US8 2775.59,2866.14 r180 top
U15 "SPX29302T5" TO-263 2145.67,1405.51 r0 top
U16 "TPS27081ADDC" SOT23-6 2712.6,1456.69 r180 top
U17 "N720" N720 3476.38,1169.29 r180 top
U18 "TPS27081ADDC" SOT23-6 2649.61,909.45 r0 top
U19 "ublox NEO-M8N" NEO-6 2149.61,826.77 r180 top
U20 "TJA1040T" SO8 1389.76,385.83 r90 top
U21 "NLSV1T34DFT2G" SC70 1586.61,487.75 r270 top
U22 "TJA1040T" SO8 1389.76,759.84 r90 top
U23 "NLSV1T34DFT2G" SC70 1586.61,862.2 r270 top

## Footprints (in the part's own frame and the unit in brackets; to place one, negate y for a bottom-side part, rotate by r counter-clockwise, add the part's x,y. Pads: shape width x height; smd on the part's side, far side on the other; paste and mask are expansions set on the pad)
0402 [mil] "Chip Capacitor, Body 1.0x0.5mm, IPC High Density"
  rect 24x21 smd: 1(20.13,0) 2(-19.87,0)
  silkscreen extent -39,-18 39,18
0603 [mm]
  rect 1x0.9 smd: 1(0,0.8) 2(0,-0.8)
  silkscreen extent -0.8,-1.5 0.8,1.5
0805 [mm]
  rect 1.2x1.3 smd: 1(0,0) 2(1.8,0)
  silkscreen extent -0.8,-0.9 2.6,0.9
1206 [mm]
  rect 1.2x1.8 smd: 1(0,0) 2(3,0)
  silkscreen extent -0.9,-1.2 3.9,1.2
1210 [mm]
  rect 1.3x2.8 smd: 1(0,0) 2(3.1,0)
  silkscreen extent -0.9,-1.6 4,1.6
1812 [mm]
  rect 1.5x3.2 smd: 1(0,0) 2(4,0)
  silkscreen extent -1,-1.9 5,1.9
2512 [mm]
  rect 1.65x3.2 smd: 1(0,0) 2(6.48,0)
  silkscreen extent -1.1,-1.9 7.6,1.9
2920 [mm]
  rect 2x5.4 smd: 1(0,0) 2(8,0)
  silkscreen extent -1.3,-3 9.3,3
3528 [mil]
  rect 75x90 smd: 1(67.5,0) 2(-67.5,0)
  silkscreen extent -118,-59 118,59
5557-10P [mm]
  rect 3x3 hole 1.8: 1(-2.75,8.4)
  round 3 hole 1.8: 2(2.75,8.4) 3(-2.75,4.2) 4(2.75,4.2) 5(-2.75,0) 6(2.75,0) 7(-2.75,-4.2) 8(2.75,-4.2) 9(-2.75,-8.4) 10(2.75,-8.4)
  silkscreen extent -17.8,-11.5 -5,11.5
ANT [mm]
  rect 1x1 smd: 1(0,-1.5)
  rect 1x2.2 smd: 2(1.5,0) 3(-1.5,0)
  silkscreen extent -1.5,-1.5 1.5,1.5
BNX002-001 [mm]
  round 2 hole 1.2: 1(2.5,2.5) 2(-2.5,2.5) 3(2.5,-2.5) 4(5,0) 5(0,0) 6(-2.5,-2.5)
  silkscreen extent -6,-5.5 6,5.5
DL-8*10.5 [mm]
  rect 1.5x4 smd: 1(0,3.5) 2(0,-3.5)
  silkscreen extent -4,-4 4,4
DL-10*10.5 [mm]
  rect 1.5x4.5 smd: 1(0,4.4) 2(0,-4.5)
  silkscreen extent -5,-5 5,5
HDR1X2 [mm] "Connector; Header; 2 Position"
  rect 1.5x1.5 hole 0.9: 1(0,0)
  round 1.5 hole 0.9: 2(2.54,0)
  silkscreen extent -1.27,-1.27 3.81,1.27
HDR1X3 [mm] "Connector; Header; 3 Position"
  rect 1.5x1.5 hole 0.9: 1(0,0)
  round 1.5 hole 0.9: 2(2.54,0) 3(5.08,0)
  silkscreen extent -1.27,-1.27 6.35,1.27
IND-SMD-5.8*5.8 [mm]
  rect 6.3x2.2 smd: 1(0,2) 2(0,-2)
  silkscreen extent -3.5,-3.4 3.5,3.4
LED-3MM [mm]
  round 1.2 hole 0.7: 1(2.5,0) 2(0,0)
  silkscreen extent -0.75,-0.8 3.25,5
MARK [mm]
  round 1 smd paste-0.5 mask+0.6: ""(0,0)
  Keep-Out Layer circle w0.2: c0,0 r1.2
MINIUSB-TYPEAB [mm]
  rect 0.5x2.5 smd: 1(1.6,0) 2(0.8,0) 3(0,0) 4(-0.8,0) 5(-1.6,0)
  rect 2x2.5 smd: 6(-4.4,5.5) 7(-4.4,0) 8(4.4,0) 9(4.4,5.5)
  Keep-Out Layer circle w0.152: c-2.2,2.6 r0.45
  Keep-Out Layer circle w0.152: c2.2,2.6 r0.45
  silkscreen extent -5.7,-1.5 5.7,7.1
MOSFET [mil]
  rect 36x36 smd: 1(0,0) 2(75,0)
  rect 36x50 smd: 3(38,80)
  silkscreen extent -20,-5 95,85
N720 [mm]
  rect 1.8x1.8 smd: 1(-13.6,14.6) 26(-13.6,-14.6) 49(13.6,-14.6) 74(13.6,14.6)
  rect 1.7x0.6 smd: 2(-13.6,12.65) 3(-13.6,11.55) 4(-13.6,10.45) 5(-13.6,9.35) 6(-13.6,8.25) 7(-13.6,7.15) 8(-13.6,6.05) 9(-13.6,4.95) 10(-13.6,3.85) 11(-13.6,2.75) 12(-13.6,1.65) 13(-13.6,0.55) 14(-13.6,-0.55) 15(-13.6,-1.65) 16(-13.6,-2.75) 17(-13.6,-3.85) 18(-13.6,-4.95) 19(-13.6,-6.05) 20(-13.6,-7.15) 21(-13.6,-8.25) 22(-13.6,-9.35) 23(-13.6,-10.45) 24(-13.6,-11.55) 25(-13.6,-12.65) 50(13.6,-12.65) 51(13.6,-11.55) 52(13.6,-10.45) 53(13.6,-9.35) 54(13.6,-8.25) 55(13.6,-7.15) 56(13.6,-6.05) 57(13.6,-4.95) 58(13.6,-3.85) 59(13.6,-2.75) 60(13.6,-1.65) 61(13.6,-0.55) 62(13.6,0.55) 63(13.6,1.65) 64(13.6,2.75) 65(13.6,3.85) 66(13.6,4.95) 67(13.6,6.05) 68(13.6,7.15) 69(13.6,8.25) 70(13.6,9.35) 71(13.6,10.45) 72(13.6,11.55) 73(13.6,12.65)
  rect 0.6x1.7 smd: 27(-11.55,-14.6) 28(-10.45,-14.6) 29(-9.35,-14.6) 30(-8.25,-14.6) 31(-7.15,-14.6) 32(-6.05,-14.6) 33(-4.95,-14.6) 34(-3.85,-14.6) 35(-2.75,-14.6) 36(-1.65,-14.6) 37(-0.55,-14.6) 38(0.55,-14.6) 39(1.65,-14.6) 40(2.75,-14.6) 41(3.85,-14.6) 42(4.95,-14.6) 43(6.05,-14.6) 44(7.15,-14.6) 45(8.25,-14.6) 46(9.35,-14.6) 47(10.45,-14.6) 48(11.55,-14.6) 75(11.55,14.6) 76(10.45,14.6) 77(9.35,14.6) 78(8.25,14.6) 79(7.15,14.6) 80(6.05,14.6) 81(4.95,14.6) 82(3.85,14.6) 83(2.75,14.6) 84(1.65,14.6) 85(0.55,14.6) 86(-0.55,14.6) 87(-1.65,14.6) 88(-2.75,14.6) 89(-3.85,14.6) 90(-4.95,14.6) 91(-6.05,14.6) 92(-7.15,14.6) 93(-8.25,14.6) 94(-9.35,14.6) 95(-10.45,14.6) 96(-11.55,14.6)
  rect 1x1 smd: 97(-10.3,11.3) 98(-10.3,-11.3) 99(10.3,-11.3) 100(10.3,11.3)
  rect 6x6 on Top Overlay: ""(-0.2,-1.9)
  silkscreen extent -15.9,-13.1 12.2,14.9
NEO-6 [mm]
  rect 1.8x0.8 smd: 1(0,0) 2(0,1.1) 3(0,2.2) 4(0,3.3) 5(0,4.4) 6(0,5.5) 7(0,6.6) 8(-0.1,9.6) 9(-0.1,10.7) 10(-0.1,11.8) 11(-0.1,12.9) 12(-0.1,14) 13(-12.3,14) 14(-12.3,12.9) 15(-12.3,11.8) 16(-12.3,10.7) 17(-12.3,9.6) 18(-12.4,6.6) 19(-12.4,5.5) 20(-12.4,4.4) 21(-12.4,3.3) 22(-12.4,2.2) 23(-12.4,1.1) 24(-12.4,0)
  silkscreen extent -12.4,-1 0,15
NLFV25 [mm]
  rect 1x1.5 smd: 1(0,0) 2(2.5,0)
  silkscreen extent -0.8,-1 3.3,1
NPN [mil]
  rect 36x50 smd: 1(38,80)
  rect 36x36 smd: 2(0,0) 3(75,0)
  silkscreen extent -20,-5 95,85
PESD2CAN [mil]
  rect 36x36 smd: 1(0,0) 2(75,0)
  rect 36x50 smd: 3(38,80)
  silkscreen extent -20,-5 95,85
PSO8 [mm]
  rect 0.6x1.9 smd: 1(0,0) 2(1.27,0) 3(2.54,0) 4(3.81,0) 5(3.81,5.56) 6(2.54,5.56) 7(1.27,5.56) 8(0,5.56)
  rect 3x2.4 smd: 9(1.9,2.78)
  silkscreen extent -1.1,-0.11 4.4,4.7
SC70 [mil]
  rect 16x32 smd: 1(0,0) 2(25.6,0) 3(51.2,0) 4(51.2,85) 5(0,85)
  silkscreen extent -25,9 76,76
SIM_CARD1 [mm] "抽屉式SIM卡座"
  rect 3.3x1.4 smd: 1(0,0) 2(0,-2.5) 3(0,-5) 4(-24,0) 5(-24,-2.5) 6(-24,-5) ""(-24,-12.4) ""(0,-12.4)
  silkscreen extent -29,-14.6 3.86,10.03
SMB [mm]
  rect 2.2x2.75 smd: 1(0,0) 2(4.5,0)
  silkscreen extent -1.5,-1.7 6,1.7
SMC [mil]
  rect 99x130 smd: 1(0,0) 2(-267.72,0)
  silkscreen extent -280,-129 12,129
SO8 [mm] "Small Outline; 8 Leads; Body Width 3.9 mm; Pitch 1.27 mm"
  rect 0.6x2.2 smd: 1(-1.905,-2.6) 2(-0.635,-2.6) 3(0.635,-2.6) 4(1.905,-2.6) 5(1.905,2.6) 6(0.635,2.6) 7(-0.635,2.6) 8(-1.905,2.6)
  silkscreen extent -2.88,-2.72 2.5,1.1
SOD123 [mm]
  rect 0.9x1 smd: 1(0,0) 2(3.15,0)
  silkscreen extent -0.8,-0.9 4,0.9
SOD323#1 [mm]
  rect 0.63x0.83 smd: 1(0,0) 2(-2.23,0)
  silkscreen extent -2.8,-0.7 0.6,0.7
SOD323#2 [mm]
  rect 1x1 smd: 1(-1.35,0) 2(1.35,0)
  silkscreen extent -2.1,-0.7 2.1,0.7
SON [mm]
  rect 0.3x0.52 smd: 1(0,0) 2(0.5,0) 3(1,0) 4(1,0.8) 5(0.5,0.8) 6(0,0.8)
  silkscreen extent -0.1,-0.8 0.1,-0.6
SOT23-6 [mm]
  rect 0.5x1 smd: 1(0,0) 2(1,0) 3(2,0) 4(2,3) 5(1,3) 6(0,3)
  silkscreen extent -0.7,0.6 2.7,2.4
SOT753 [mm]
  rect 1x0.6 smd: 1(0,0)
  oval 1x0.6 smd: 2(0,-0.95) 3(0,-1.9) 4(3,-1.9) 5(3,0)
  silkscreen extent 0,-2.5 3,0.6
SUPERCAP [mm]
  round 1.8 hole 1: 1(-2.54,0) 2(2.54,0)
  silkscreen extent -6.5,-22 6.5,-1.3
TO-263 [mm]
  rect 1.1x4.3 smd: 1(0,0.1) 2(1.7,0.1) 3(3.4,0.1) 4(5.1,0.1) 5(6.8,0.1)
  rect 10.8x10.4 smd: ""(3.4,9)
TSOT23-8 [mm]
  rect 1.2x0.3 smd: 1(0,0)
  oval 1.2x0.3 smd: 2(0,-0.65) 3(0,-1.3) 4(0,-1.95) 5(2.6,-1.95) 6(2.6,-1.3) 7(2.6,-0.65) 8(2.6,0)
  silkscreen extent -1.2,-2.4 3.4,0.4
US8 [mm]
  rect 0.3x1.5 smd: 1(0,-0.1) 2(0.5,-0.1) 3(1,-0.1) 4(1.5,-0.1) 5(1.5,2.8) 6(1,2.8) 7(0.5,2.8) 8(0,2.8)
  silkscreen extent -0.4,-1.2 1.9,2.5
VT18-CPU-BOARD [mm]
  oval 2.05x0.76 smd: 1(51.825,46.915)
  rect 2.05x0.76 smd: 2(55.575,46.915) 3(51.825,45.645) 4(55.575,45.645) 5(51.825,44.375) 6(55.575,44.375) 7(51.825,43.105) 8(55.575,43.105) 9(51.825,41.835) 10(55.575,41.835) 11(51.825,40.565) 12(55.575,40.565) 13(51.825,39.295) 14(55.575,39.295) 15(51.825,38.025) 16(55.575,38.025) 17(51.825,36.755) 18(55.575,36.755) 19(51.825,35.485) 20(55.575,35.485) 21(51.825,34.215) 22(55.575,34.215) 23(51.825,32.945) 24(55.575,32.945) 25(51.825,31.675) 26(55.575,31.675) 27(51.825,30.405) 28(55.575,30.405) 29(51.825,29.135) 30(55.575,29.135) 31(51.825,27.865) 32(55.575,27.865) 33(51.825,26.595) 34(55.575,26.595) 35(51.825,25.325) 36(55.575,25.325) 37(51.825,24.055) 38(55.575,24.055) 39(51.825,22.785) 40(55.575,22.785) 41(51.825,21.515) 42(55.575,21.515) 43(51.825,20.245) 44(55.575,20.245) 45(51.825,18.975) 46(55.575,18.975) 47(51.825,17.705) 48(55.575,17.705) 49(51.825,16.435) 50(55.575,16.435) 51(51.825,15.165) 52(55.575,15.165) 53(51.825,13.895) 54(55.575,13.895) 55(51.825,12.625) 56(55.575,12.625) 57(51.825,11.355) 58(55.575,11.355) 59(51.825,10.085) 60(55.575,10.085)
  round 6 hole 3.65: MT1(3,3) MT2(55,3) MT3(3,54) MT4(55,54)
  round 6 on Top Paste: ""(3,54) ""(3,3) ""(55,54) ""(55,3)
  silkscreen extent 0,0 58,57

## Part data
C1 C2 C3 C4 C5 C6 C8 C9 C10 C12 C14 C15 C23 C24 C25 C27 C29 C33 C36 C39 C40 C41 C42 C43 C48 C50 C51: library part Cap, "Capacitor"
C7 C11 C16 C17 C19 C20 C22 C28 C30 C35 C52 C54: library part "CAP WP"
C13 C18 C21 C26 C31 C32 C34 C37 C38: library part "CAP NP_Dup2"
C49 C53 C55 C56 C57 C58 C59 C60 C61 C62 C63 C64 C65 C66 C67 C68 C69 C70 C71 C72 C73 C74 C75: library part "P_CAP NP"
C76 C77 C78: library part CAP_Dup1
D1: library part TVS-BI
D2 D3 D4 D5 D6 D7 D8 D10 D12 D23 D24: library part "Diode 11DQ03", "Schottky Rectifier"
D9 D11 D25: library part MMGZ5231BPTLL34
D13 D19 D20 D21 D22: library part LN01401_1
D15 D16: library part PESD2CAN
D18: library part PESD
F1: library part 2A_32VDC_0467-002
J1 J2: library part "Header 2", "Header, 2-Pin"
J3 J5: library part HRS_U_0.FL-R-SMT-10
J6: library part "Header 3", "Header, 3-Pin"
J7: library part FOX_UH51543-JS7
J8: library part "Header 5X2H", "Header, 5-Pin, Dual row, Right Angle"
L1 L3 L4 L5 L6 L7: library part 4.7UH_CDH2D09BNP-4R7MC_0.7A_20%
L2: library part BNX002-01
L8: library part 2.2UH_LPS3015-222MLC_1.5A_20%~D
L9 L10: library part Inductor, "Inductor"
L11: library part L_0
Q1 Q2 Q3: library part MMBT3904_NL_SOT23-3
Q4 Q5 Q7 Q9 Q10 Q11 Q12 Q13: library part MOSFET-N, "N-Channel MOSFET"
Q6 Q8: library part AO3401L_SOT23-3_0
R1 R2 R3 R4 R6 R8 R9 R13 R14 R15 R16 R17 R21 R27 R29 R41 R42 R43 R47 R48 R53 R54 R55 R56: library part Res3, "Resistor"
R5 R7 R10 R11 R12 R18 R19 R20 R22 R23 R24 R25 R26 R28 R30 R31 R33 R36 R40 R44 R51 R52 R72 R73 R74 R75 R76 R77 R78: library part CR16-1003FM
R32 R34 R35 R37 R38 R39 R79 R80 R81 R82 R83 R84: library part R
R45 R46 R49 R50 R57 R58 R59 R60 R61 R62 R63 R64 R65 R66 R67 R68 R69 R70 R71: library part P_R
U1 U3: library part LM22670_0
U2 U4 U5: library part MP1482_5
U6: library part TPS3896
U11 U13: library part 74LVC1G04GW_SOT353-5
U14: library part NC7SZ74-US8_0, "IC;NC7SZ74,D-TYPE FLIP-FLOP,US8"
U15: library part MIC29302AWU
U16 U18: library part TPS27081A
U19: library part NEO-M8
U20 U22: library part TJA1040T_SO_8P, "IC XCVR CAN HS 5V SO8"

## Free pads (board coordinates)
  round 60 on Plane1: ""(409.45,2334.65) ""(425.2,1858.27) ""(425.2,1901.57) ""(460.63,2334.65) ""(468.5,1858.27) ""(468.5,1901.57) ""(511.81,1858.27) ""(511.81,1901.57) ""(511.81,2334.65) ""(559.06,1858.27) ""(559.06,1901.57) ""(562.99,2334.65) ""(614.17,2334.65) ""(622.05,1539.37) ""(622.05,1578.74) ""(661.42,1539.37) ""(661.42,1578.74) ""(700.79,1539.37) ""(700.79,1578.74) ""(740.16,1539.37) ""(740.16,1578.74) ""(779.53,1539.37) ""(779.53,1578.74) ""(818.9,1539.37) ""(818.9,1578.74) ""(866.14,1846.46) ""(866.14,1885.83) ""(866.14,1925.2) ""(866.14,1964.57) ""(901.57,1964.57) ""(929.13,2086.61) ""(929.13,2244.09) ""(1086.61,1980.31) ""(1125.98,1980.31) ""(1165.35,1980.31) ""(1204.72,1980.31) ""(1224.41,1527.56) ""(1224.41,1570.87) ""(1244.09,1980.31) ""(1263.78,1527.56) ""(1263.78,1570.87) ""(1303.15,1527.56) ""(1303.15,1570.87) ""(1346.46,1901.57) ""(1346.46,1940.94) ""(1346.46,1980.31) ""(1389.76,1901.57) ""(1389.76,1940.94) ""(1389.76,1980.31) ""(1555.12,2098.43) ""(1555.12,2244.09) ""(1842.52,1960.63)
  round 60 on Plane2: ""(570.87,2110.24) ""(570.87,2153.54) ""(570.87,2196.85) ""(614.17,2110.24) ""(614.17,2153.54) ""(614.17,2196.85) ""(929.13,2086.61) ""(1086.61,1980.31) ""(1125.98,1980.31) ""(1165.35,1980.31) ""(1204.72,1980.31) ""(1244.09,1980.31)
  round 70 on Plane1: ""(874.02,1149.61) ""(874.02,1196.85) ""(874.02,1244.09) ""(874.02,1291.34) ""(917.32,1149.61) ""(917.32,1196.85) ""(917.32,1244.09) ""(917.32,1291.34) ""(960.63,1149.61) ""(960.63,1196.85) ""(960.63,1244.09) ""(960.63,1291.34)
  round 65 on Plane1: ""(1740.16,1960.63) ""(1740.16,2000) ""(1791.34,1960.63) ""(1791.34,2000) ""(1842.52,2000)
  round 70 on Plane2: ""(1850.39,2566.93) ""(1850.39,2614.17) ""(1866.14,2688.98) ""(1874.02,1996.06) ""(1874.02,2318.9) ""(1874.02,2393.7) ""(1874.02,2437.01) ""(1893.7,1913.39) ""(1897.64,2346.46) ""(1901.57,1881.89) ""(1901.57,1964.57) ""(1901.57,2523.62) ""(1901.57,2653.54) ""(1901.57,2566.93) ""(1901.57,2614.17) ""(1909.45,2484.25) ""(1921.26,2362.2) ""(1921.26,2393.7) ""(1921.26,2437.01) ""(1933.07,1937.01) ""(1933.07,2622.05) ""(1940.94,1893.7) ""(1952.76,2397.64) ""(1956.69,2425.2) ""(1956.69,2464.57) ""(1956.69,2511.81) ""(1956.69,2551.18) ""(1956.69,2594.49)

## Via types
v1: diameter 32, hole 16, Top Layer to Bottom Layer, tented both sides, 365 vias
v2: diameter 18, hole 8, Top Layer to Bottom Layer, tented both sides, 235 vias

## Nets (pads, with @x,y where several pads share a name; then routed paths per layer and width w, separated by ;. In a path a pad name is that pad's centre, name@x,y a point inside that pad or via, vN(x,y) a via of type N, cw(c..) or ccw(c..) an arc to the next point about the centre after c; other vN are vias at no path point)
ACC: R36.2 U9.4 U11.2 | length 271.7
  Top Layer w5: R36.2@2362.2,2787.21 2423.05,2787.21 U9.4@2425.18,2785.08 2443.27,2785.08 2450.79,2777.56 U11.2@2450.79,2598.43
ACC-INPUT: C42.1 C43.1 J8.3 L11.2 | length 434.7
  Bottom Layer w10: C42.1@283.46,1137.8 C43.1@283.46,1185.04 303.15,1165.35 L11.2@362.2,1165.35 405.51,1165.35 417.32,1153.54 417.32,1094.49 527.56,984.25 J8.3@553.15,984.25
ACC-STATUS: M1.17 R33.2 U8.4 | length 253.6
  Top Layer w5: M1.17@3482.48,2306.1 3482.48,2415.55 3519.5,2452.57 R33.2@3519.5,2488.19 3519.68,2488.38 3519.68,2511.81 3511.8,2519.7 U8.4@3511.8,2540.98
BM-SEL: J1.1 M1.41 | length 3561.5
  Top Layer w5: v2(2881.89,2236.22) 2882.48,2236.81 M1.41@2882.48,2306.1
  Bottom Layer w5: v2(2881.89,2236.22) 2881.89,2173.23 2834.65,2125.98 2720.47,2125.98 2657.48,2062.99 2657.48,1696.85 2748.03,1606.3 2748.03,1362.2 2720.47,1334.65 2649.61,1334.65 2629.92,1314.96 2629.92,1066.93 2767.72,929.13 2767.72,279.53 2834.65,212.6 3629.92,212.6 3736.22,318.9 J1.1@3885.83,318.9
CAN1-RX: M1.11 U21.4 | length 3622.8
  Top Layer w5: v2(1669.29,397.64) 1671.61,399.96 U21.4@1671.61,436.55 ; M1.11@3632.48,2306.1 3632.48,2245.47 v2(3633.86,2244.09)
  Bottom Layer w5: v2(1669.29,397.64) 1669.29,519.68 1830.71,681.1 1830.71,996.06 1909.45,1074.8 1909.45,1314.96 1972.44,1377.95 1972.44,1917.32 2055.12,2000 2358.27,2000 2523.62,2165.35 2708.66,2165.35 2858.27,2314.96 3421.26,2314.96 3515.75,2220.47 3610.24,2220.47 v2(3633.86,2244.09)
CAN1-TX: M1.9 U20.1 | length 3913.4
  Top Layer w5: U20.1@1492.13,310.83 1492.32,311.02 v2(1582.68,311.02) ; v2(3681.1,2244.09) 3682.48,2245.47 M1.9@3682.48,2306.1
  Bottom Layer w5: v2(1582.68,311.02) 1724.41,311.02 1763.78,350.39 1763.78,582.68 1850.39,669.29 1850.39,988.19 1925.2,1062.99 1925.2,1307.09 1988.19,1370.08 1988.19,1905.51 2062.99,1980.31 2366.14,1980.31 2535.43,2149.61 2716.54,2149.61 2866.14,2299.21 3409.45,2299.21 3507.87,2200.79 3637.8,2200.79 v2(3681.1,2244.09)
CAN1_N: C68.1 D15.2 J8.9 R66.2 U20.6 | length 1693.8
  Top Layer w10: J8.9@553.15,488.19 478.35,562.99 394.43,562.99 358.58,527.15 358.58,373.7 401.26,331.02 883.61,331.02 948.41,395.83 1145.67,395.83 ; C68.1@1146.11,543.31 1145.67,542.87 R66.2@1145.67,464.57 1145.67,395.83 ; U20.6@1287.4,410.83 1239.09,410.83 1224.09,395.83 1145.67,395.83
  Bottom Layer w30: D15.2@401.57,539.17 452.95,539.17 503.94,488.19 J8.9@553.15,488.19
CAN1_P: C64.2 D15.1 J8.7 R64.1 U20.7 | length 1749.4
  Top Layer w10: J8.7@553.15,653.54 482.6,582.99 386.14,582.99 338.58,535.43 338.58,365.42 392.98,311.02 891.89,311.02 956.69,375.83 1145.67,375.83 ; C64.2@1145.86,232.28 1145.86,310.83 R64.1@1145.67,311.02 1145.67,375.83 ; U20.7@1287.4,360.83 1239.09,360.83 1224.09,375.83 1145.67,375.83
  Bottom Layer w30: D15.1@401.57,614.17 456.69,614.17 496.06,653.54 J8.7@553.15,653.54
CAN2-RX: M1.15 U23.4 | length 3162.2
  Top Layer w5: U23.4@1671.61,811.01 1671.61,769.33 v2(1673.23,767.72) ; v2(3531.5,2244.09) 3532.48,2245.08 M1.15@3532.48,2306.1
  Bottom Layer w5: v2(1673.23,767.72) 1673.23,799.21 1767.72,893.7 1767.72,960.63 1893.7,1086.61 1893.7,1322.83 1956.69,1385.83 1956.69,1929.13 2047.24,2019.69 2350.39,2019.69 2511.81,2181.1 2700.79,2181.1 2850.39,2330.71 3444.88,2330.71 v2(3531.5,2244.09)
CAN2-TX: M1.13 U22.1 | length 3423
  Top Layer w5: U22.1@1492.13,684.84 1570.67,684.84 v2(1570.87,685.04) ; M1.13@3582.48,2306.1 3582.48,2244.29 v2(3582.68,2244.09)
  Bottom Layer w5: v2(1570.87,685.04) 1606.3,685.04 1637.8,716.54 1637.8,858.27 1877.95,1098.43 1877.95,1330.71 1940.94,1393.7 1940.94,1940.94 2039.37,2039.37 2342.52,2039.37 2500,2196.85 2692.91,2196.85 2842.52,2346.46 3480.31,2346.46 v2(3582.68,2244.09)
CAN2_N: C74.1 D16.2 J8.8 R70.2 U22.6 | length 988.4
  Top Layer w10: J8.8@769.69,653.54 832.83,590.39 853.45,590.39 889.76,626.71 889.76,717.26 942.35,769.84 1145.67,769.84 ; R70.2@1145.67,834.65 1145.67,769.84 ; R70.2@1146.11,835.09 C74.1@1146.11,913.39 ; U22.6@1287.4,784.84 1239.09,784.84 1224.09,769.84 1145.67,769.84
  Bottom Layer w30: J8.8@769.69,653.54 795.28,653.54 834.45,614.37 D16.2@921.26,614.37
CAN2_P: C70.2 D16.1 J8.10 R68.1 U22.7 | length 1001.5
  Top Layer w10: J8.10@769.69,488.19 851.89,570.39 861.73,570.39 909.76,618.43 909.76,708.98 950.63,749.84 1145.67,749.84 ; R68.1@1145.67,685.04 1145.67,749.84 ; C70.2@1145.86,606.3 R68.1@1145.86,684.85 ; U22.7@1287.4,734.84 1239.09,734.84 1224.09,749.84 1145.67,749.84
  Bottom Layer w30: J8.10@769.69,488.19 787.4,488.19 838.58,539.37 D16.1@921.26,539.37